# Altium PCB PCB1.PcbDoc (part 1 of 2)
Units mm, origin at the board's own origin, x right, y up, seen from the top; angles counter-clockwise.
Board outline 65.4 x 65.4 mm, 4 copper layers (Top Layer, Internal Plane 1, Signal Layer 1, Bottom Layer), stack 0.778 mm thick; 93 components, 59 nets, 348 pads, 1252 vias.
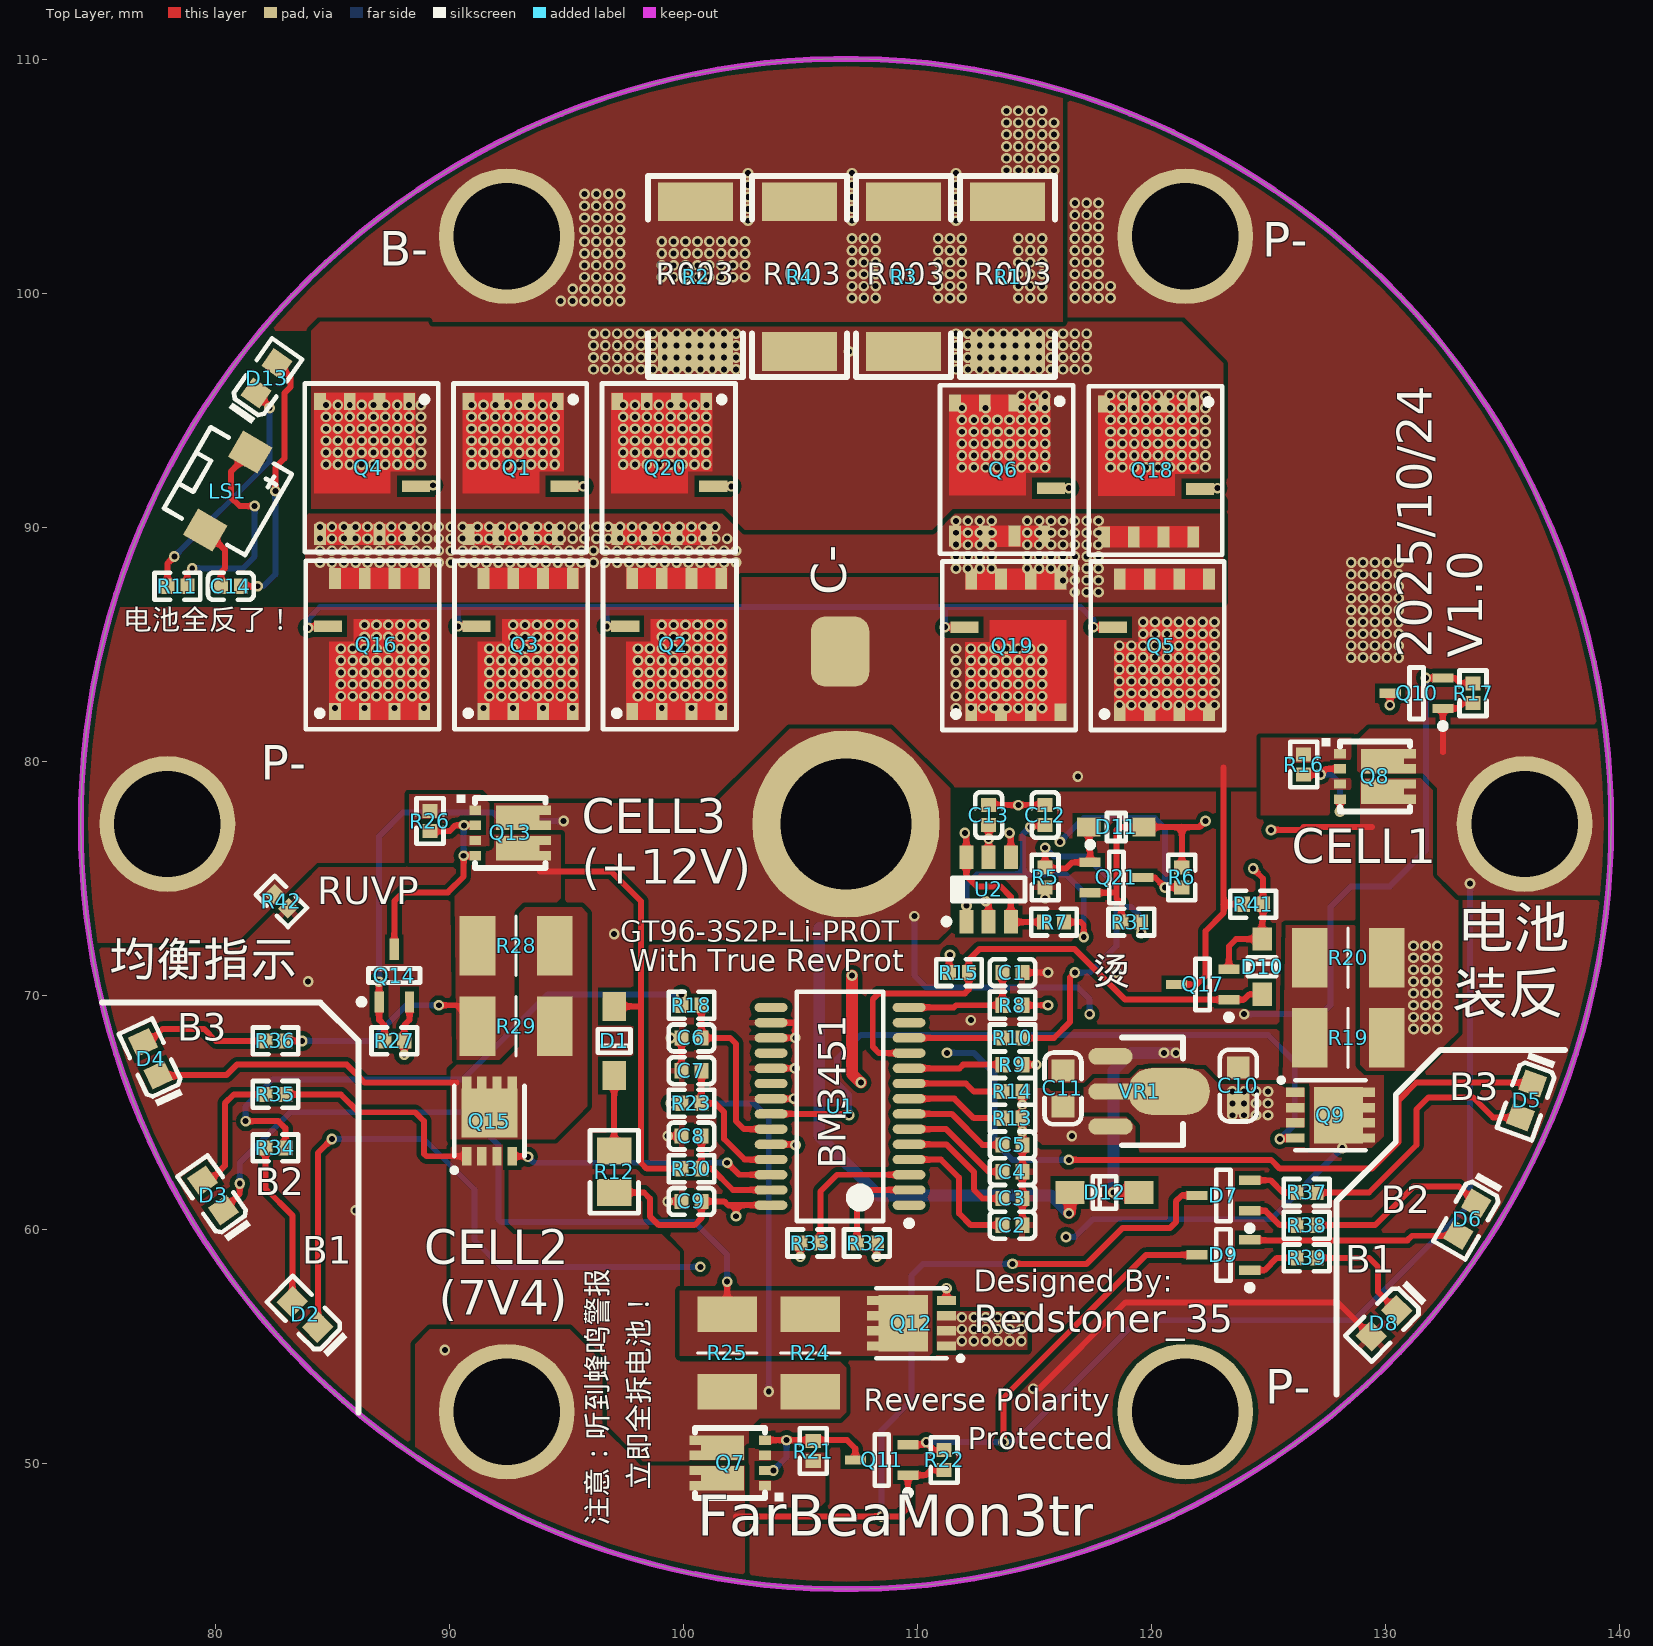
[diagram p0: Top Layer view]
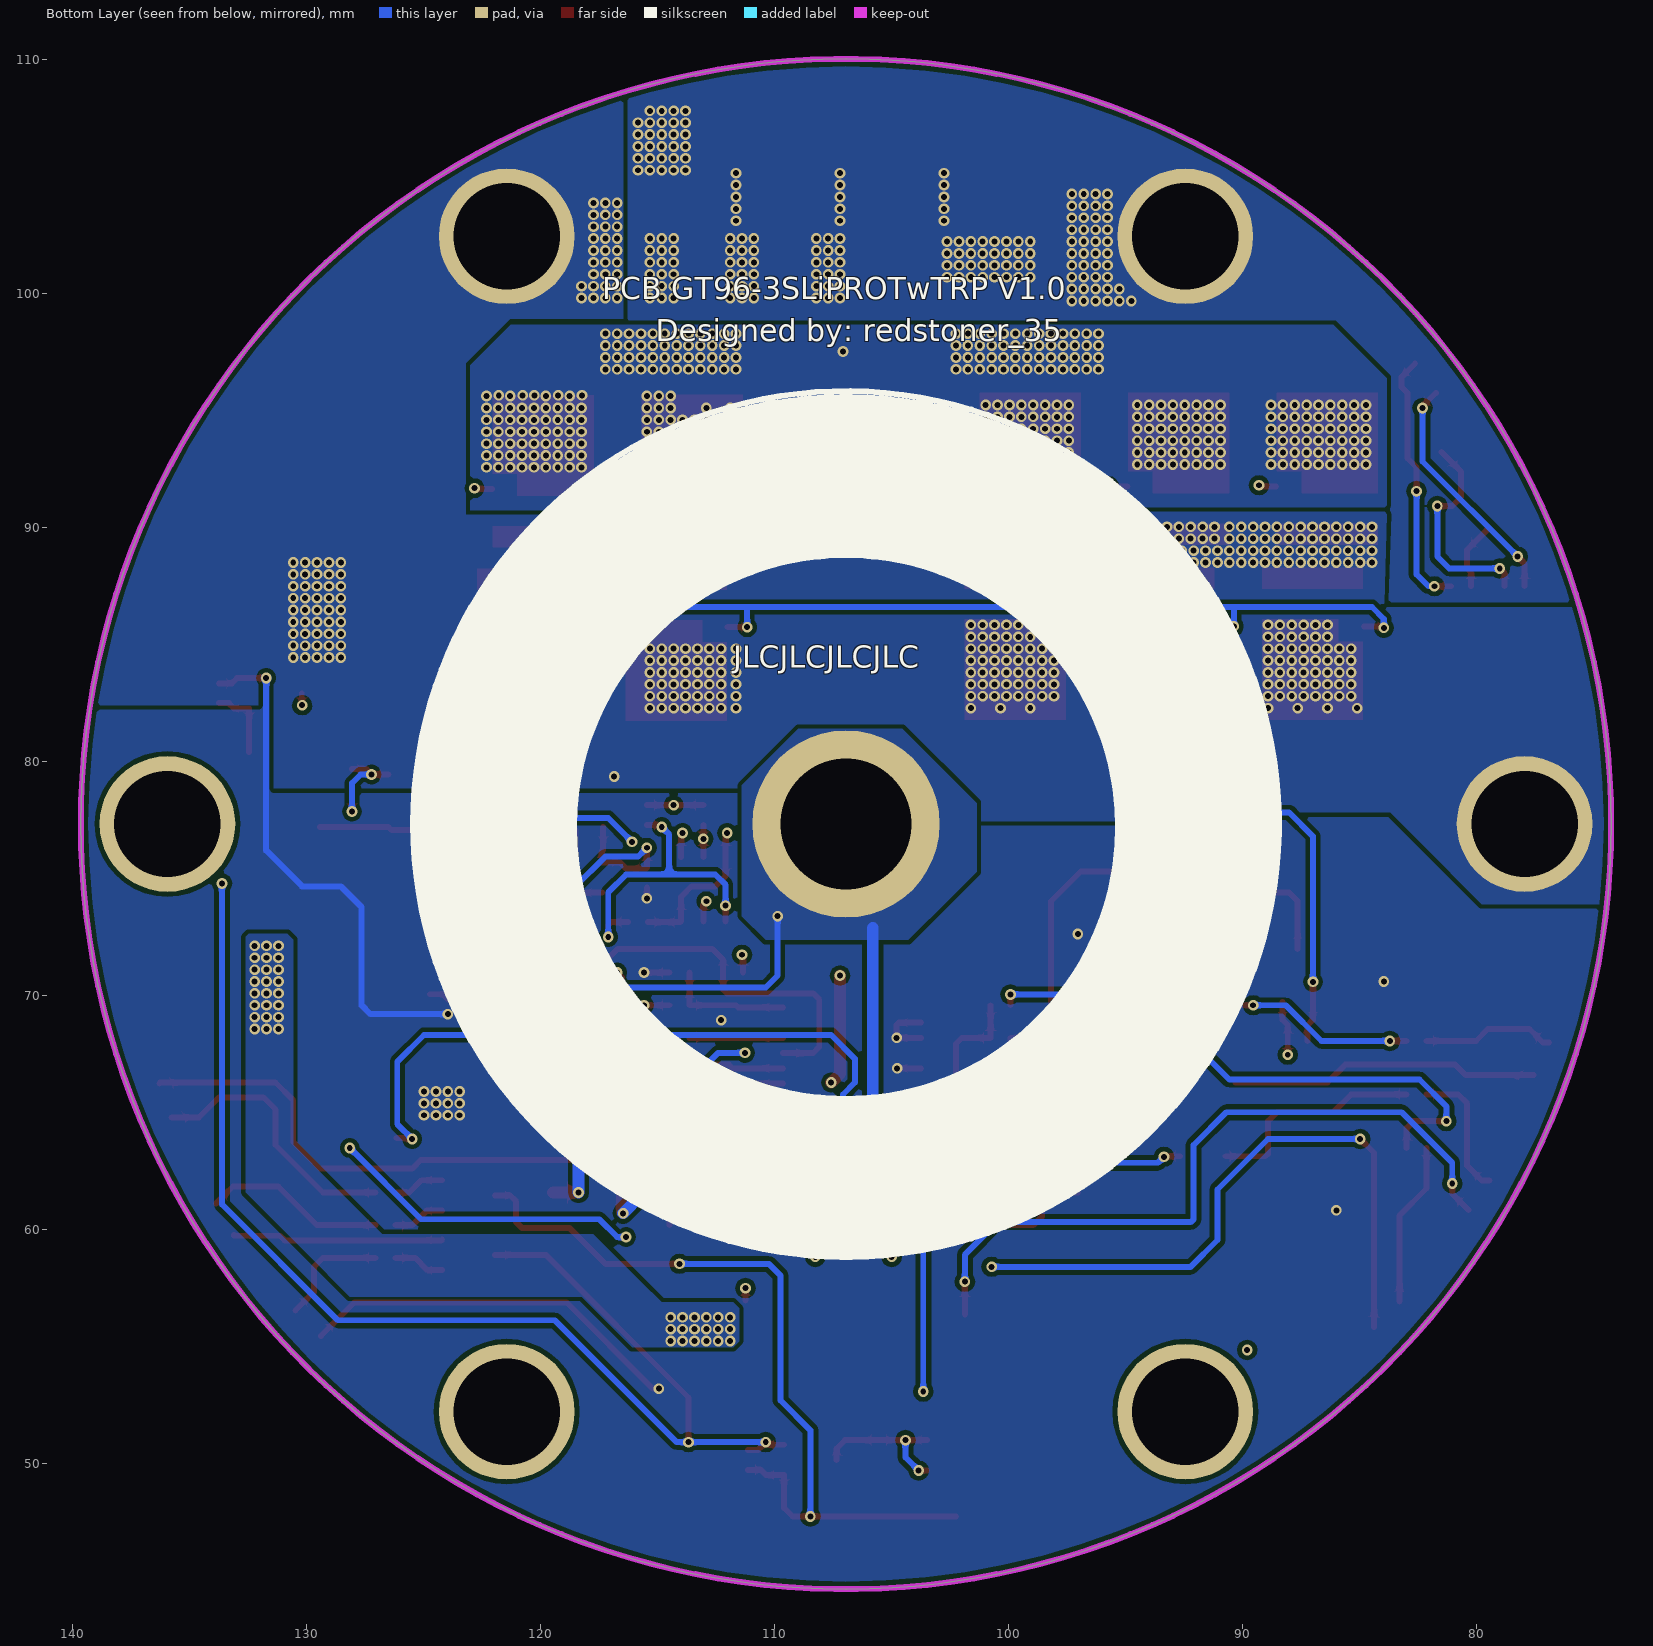
[diagram p1: Bottom Layer view, seen from below]
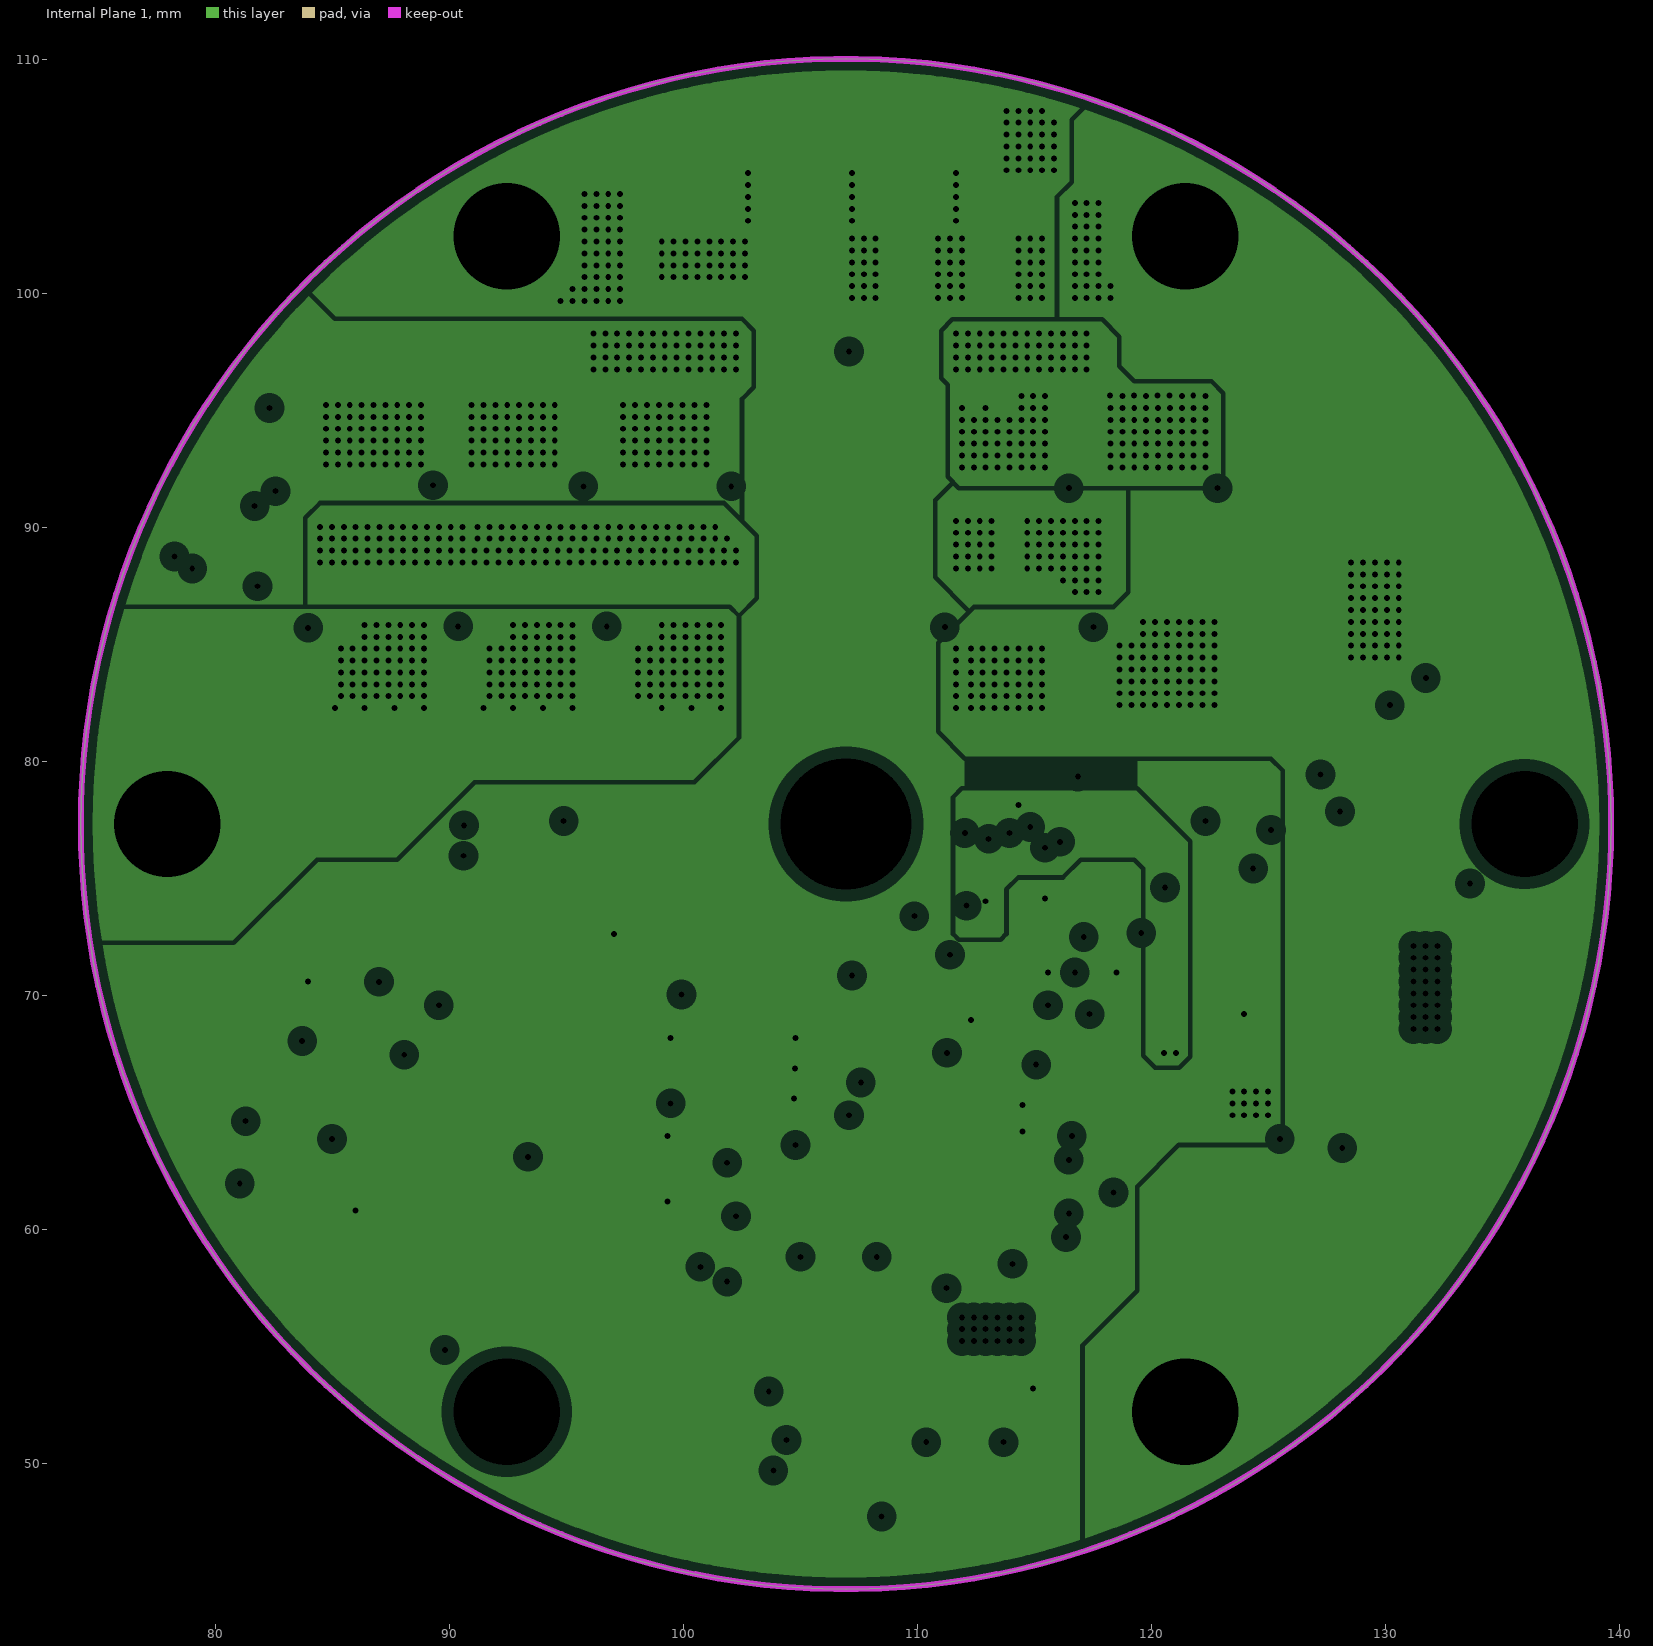
[diagram p2: Internal Plane 1, clearances drawn from the general rule]
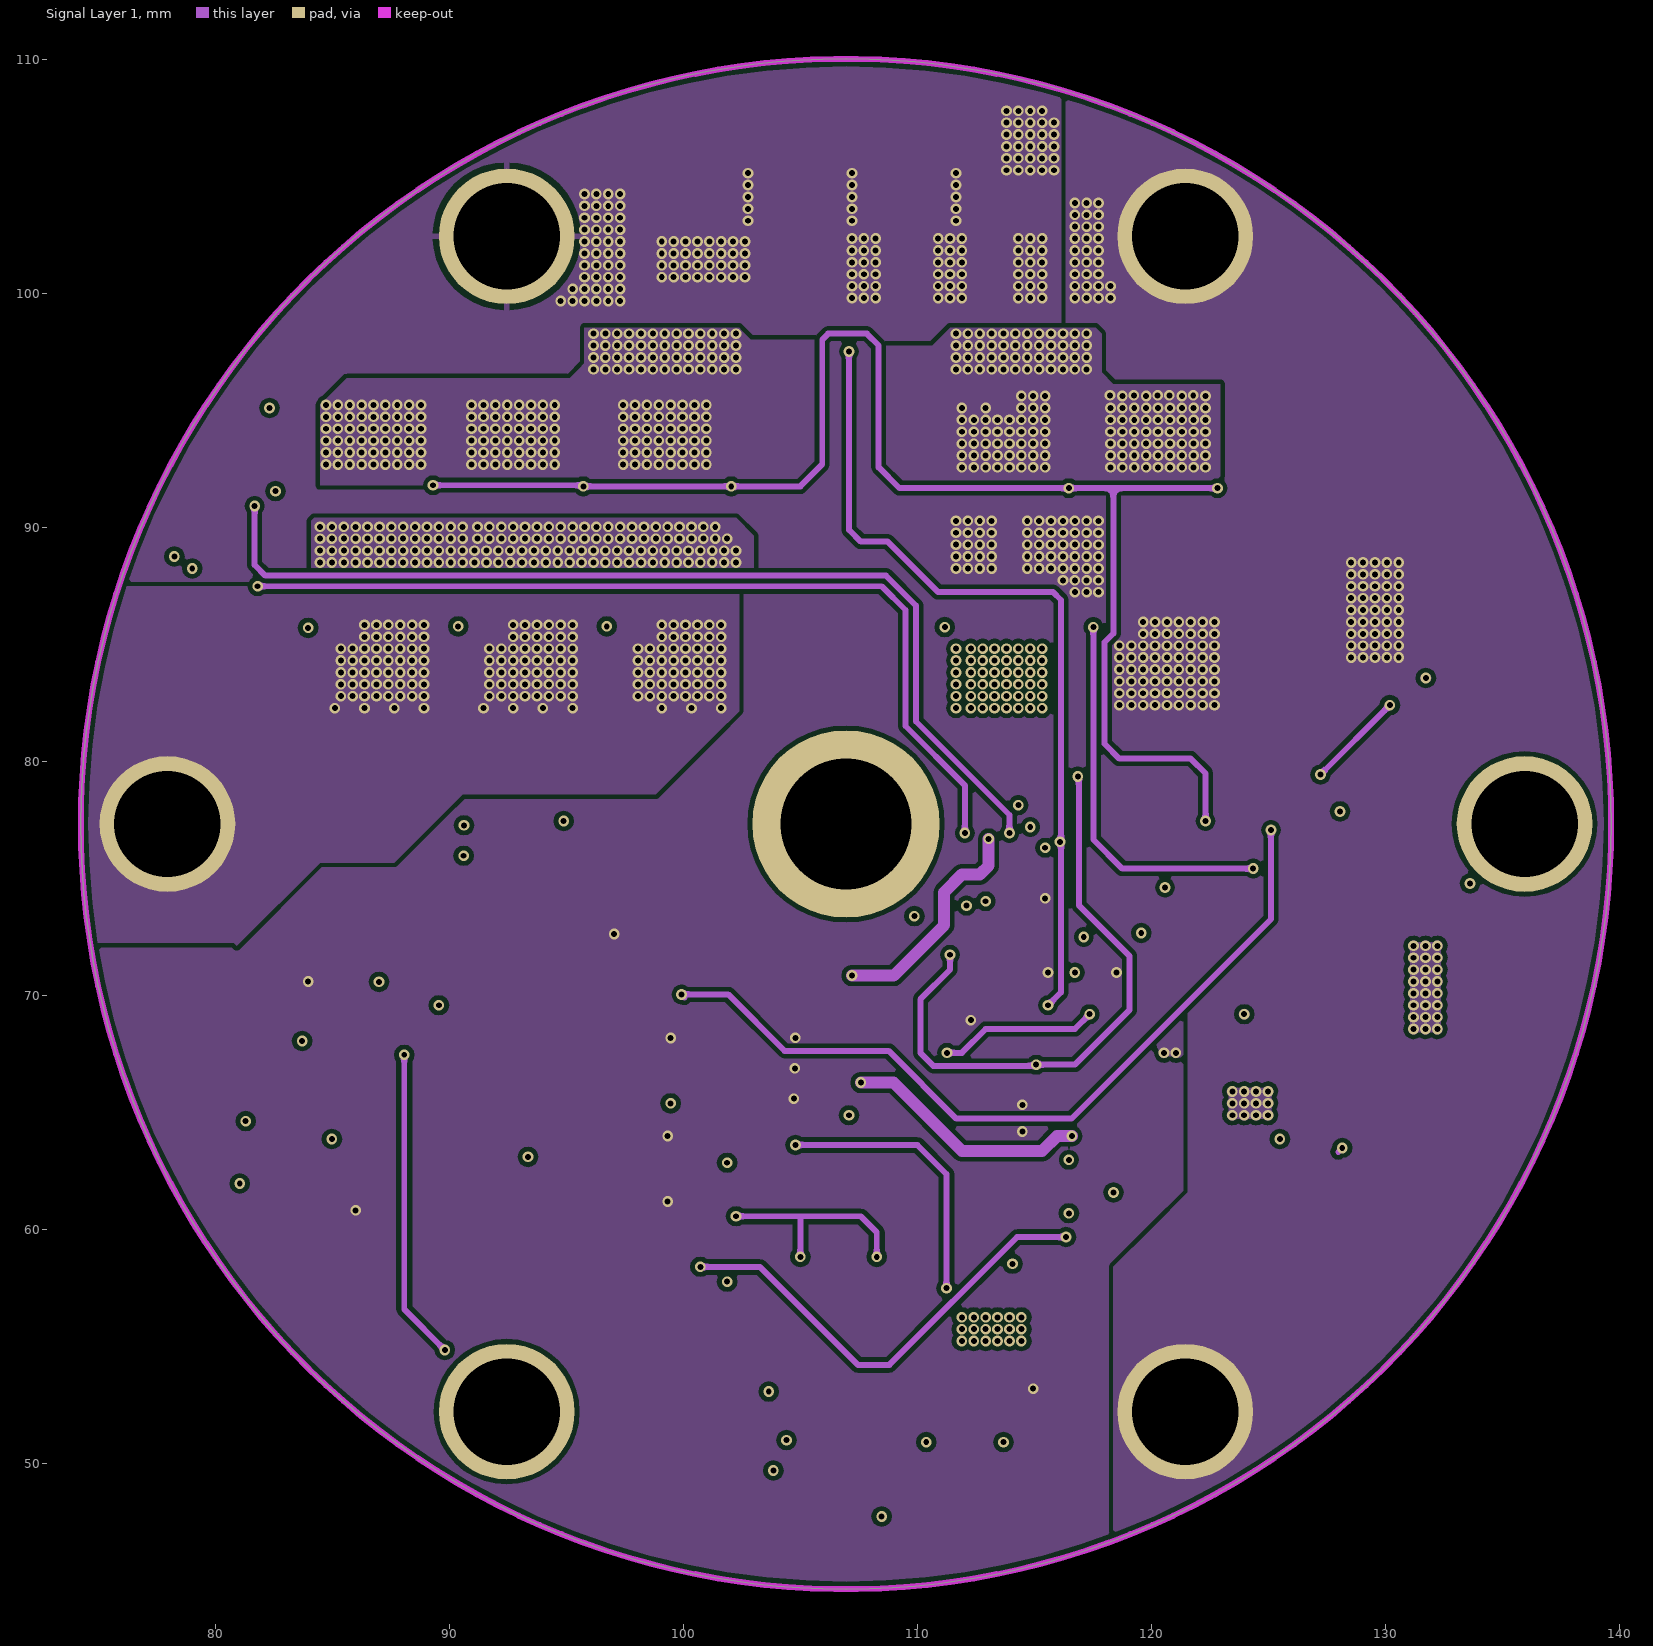
[diagram p3: Signal Layer 1]
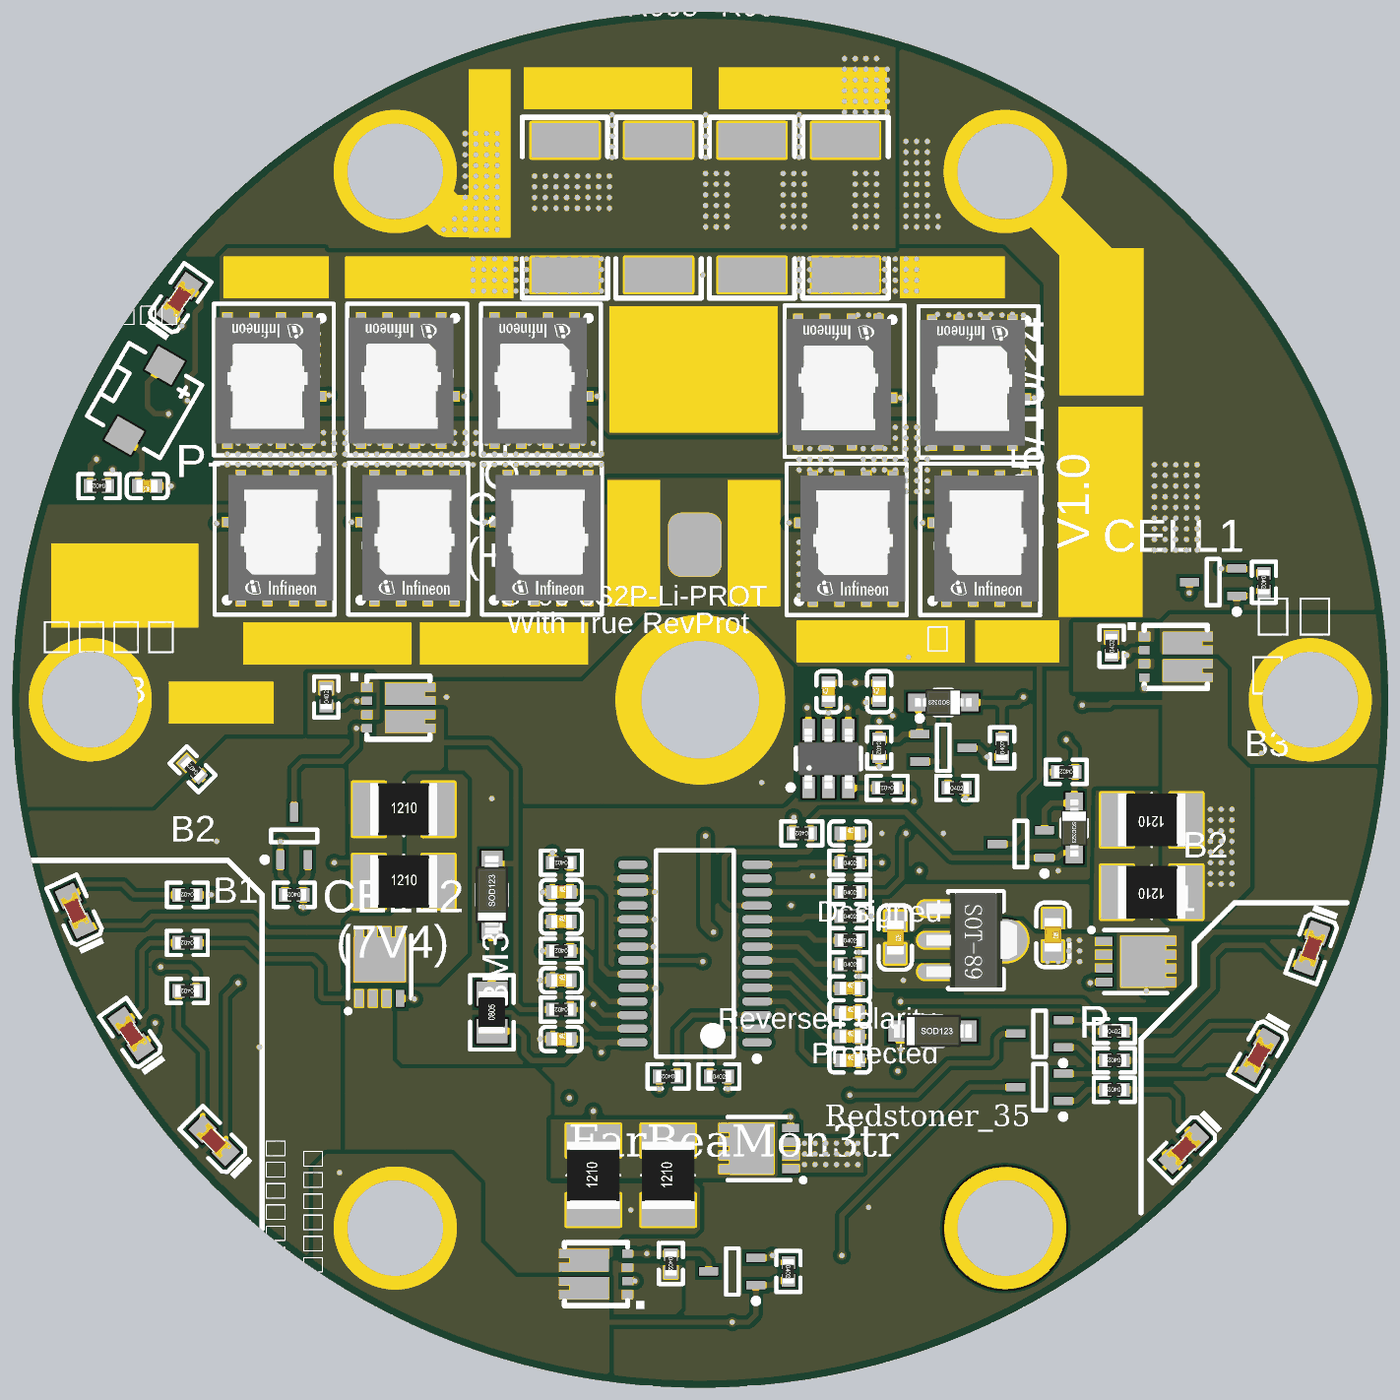
[diagram p5: 3D render of the assembled board from above, using the file's embedded part models]

## Layer stack, top to bottom
Top Solder: solder mask 0.0102, Solder Resist, Dk 3.5
Top Layer: signal copper 0.0356
Dielectric 1: core 0.254, FR-4, Dk 4.2
Internal Plane 1: plane copper 0.036
Dielectric 3: prepreg 0.127, Dk 4.2
Signal Layer 1: signal copper 0.036
Dielectric 2: core 0.254, Dk 4.2
Bottom Layer: signal copper 0.0356
Bottom Solder: solder mask 0.0102, Solder Resist, Dk 3.5

## Board outline
74.234,77.343 ccw(c106.934,77.343) 106.934,44.643 ccw(c106.934,77.343) 139.634,77.343 ccw(c106.934,77.343) 106.934,110.043 ccw(c106.934,77.343)

## Design rules (kind name [scope] priority, off if disabled: settings)
Clearance [All] p1: gap=0.198
PlaneClearance [All] p1: clearance=0.508
PlaneConnect [All] p1: planeconnectstyle=Direct reliefexpansion=0.508 reliefentries=4 reliefconductorwidth=0.254 reliefairgap=0.254
PolygonConnect PolygonConnect_1 [IsVia] p1: connectstyle=Direct reliefconductorwidth=0.254 reliefentries=4 polygonreliefangle="90 Angle" airgapwidth=0.254
PolygonConnect [All] p2: connectstyle=Relief reliefconductorwidth=0.254 reliefentries=4 polygonreliefangle="90 Angle" airgapwidth=0.254
RoomDefinition main [InComponentClass('main')] p1: confinementstyle=ConfineIn formatcopy=TRUE lockcomponents=FALSE outline 178.943,26.924 277.241,26.924 277.241,40.259 178.943,40.259
RoutingVias [All] p1: holewidth=0.711 width=1.27 viastyle="Through Hole" minholewidth=0.711 minwidth=1.27 maxholewidth=0.711 maxwidth=1.27
SolderMaskExpansion [All] p1: expansion=0.102
Width [All] p1: maxlimit=50.8 minlimit=0.178 preferedwidth=0.254
28 further rules are at their usual default settings.

## Components (designator, comment, footprint, x,y, rotation, side; value= is the part's Value field where it differs from the comment)
C1 "10nF (103) 10% 50V" 0402_C 114.046,70.993 r0 top
C2 "100nF (104) 10% 16V" 0402_C 114.046,60.198 r0 top
C3 "100nF (104) 10% 16V" 0402_C 114.046,61.341 r0 top
C4 "100nF (104) 10% 16V" 0402_C 114.046,62.484 r0 top
C5 "100nF (104) 10% 16V" 0402_C 114.046,63.627 r0 top
C6 "1.0uF (105) 10% 25V" 0402_C 100.33,68.199 r0 top
C7 "1.0uF (105) 10% 25V" 0402_C 100.33,66.802 r0 top
C8 "1.0uF (105) 10% 25V" 0402_C 100.33,64.008 r0 top
C9 "2.2uF (225) 10% 25V" 0402_C 100.33,61.214 r0 top
C10 "1uF (105) 10% 50V" 0603_C 123.698,66.167 r270 top
C11 "10uF (106) 10% 10V" 0603_C 116.205,66.04 r270 top
C12 "150nF (154) 10% 16V" 0402_C 115.443,77.724 r90 top
C13 "100nF (104) 10% 16V" 0402_C 113.03,77.724 r90 top
C14 "10uF (106) 20% 10V" 0402_C 80.645,87.503 r180 top
D1 "B5819W  SL" SOD-123 97.028,68.072 r90 top
D2 "绿灯 0603" 0603_LED_S1 83.82,56.388 r135 top
D3 "绿灯 0603" 0603_LED_S1 79.883,61.468 r125 top
D4 "绿灯 0603" 0603_LED_S1 77.216,67.31 r115 top
D5 "红灯 0603" 0603_LED_S1 136.017,65.532 r250 top
D6 "红灯 0603" 0603_LED_S1 133.477,60.452 r240 top
D7 "BAV99W" SC70-3 123.063,61.468 r180 top
D8 "红灯 0603" 0603_LED_S1 129.921,56.007 r225 top
D9 "BAV99W" SC70-3 123.063,58.928 r180 top
D10 "1N5819WS S4" SOD-323 124.714,71.247 r270 top
D11 "1N5819WS S4" SOD-323 118.491,77.216 r180 top
D12 "B5819W  SL" SOD-123 117.983,61.595 r0 top
D13 "无级红灯 0603" 0603_LED_S1 82.169,96.393 r55 top
LS1 "FUET-4020C" FUET-4020C 80.518,91.567 r240 top
Q1 "IQDH29NE2LM5CGSC" IFX-PG-WHTFN-9-2-V 92.858,92.565 r270 top
Q2 "IQDH29NE2LM5CGSC" IFX-PG-WHTFN-9-2-V 99.552,84.996 r90 top
Q3 "IQDH29NE2LM5CGSC" IFX-PG-WHTFN-9-2-V 93.202,84.996 r90 top
Q4 "IQDH29NE2LM5CGSC" IFX-PG-WHTFN-9-2-V 86.508,92.565 r270 top
Q5 "IQDH29NE2LM5CGSC" IFX-PG-WHTFN-9-2-V 120.396,84.963 r90 top
Q6 "IQDH29NE2LM5CGSC" IFX-PG-WHTFN-9-2-V 113.649,92.489 r270 top
Q7 "XPX30V02" EDFN3x3 101.981,50.038 r90 top
Q8 "XPX30V02" EDFN3x3 129.54,79.375 r270 top
Q9 "WSD3050DN" DFN-8_L3.0-W3.0-P0.65-BL 127.635,64.897 r270 top
Q10 "2N7002KW" SC70-3 131.318,82.931 r180 top
Q11 "2N7002KW" SC70-3 108.458,50.165 r180 top
Q12 "WSD3050DN" DFN-8_L3.0-W3.0-P0.65-BL 109.728,56.007 r90 top
Q13 "XPX30V02" EDFN3x3 92.583,76.962 r270 top
Q14 "2N7002KW" SC70-3 87.63,70.866 r90 top
Q15 "WSD3050DN" DFN-8_L3.0-W3.0-P0.65-BL 91.694,64.643 r0 top
Q16 "IQDH29NE2LM5CGSC" IFX-PG-WHTFN-9-2-V 86.852,84.996 r90 top
Q17 "BSS84PW" SC70-3 122.174,70.485 r180 top
Q18 "IQDH29NE2LM5CGSC" IFX-PG-WHTFN-9-2-V 120.015,92.456 r270 top
Q19 "IQDH29NE2LM5CGSC" IFX-PG-WHTFN-9-2-V 114.046,84.963 r90 top
Q20 "IQDH29NE2LM5CGSC" IFX-PG-WHTFN-9-2-V 99.208,92.565 r270 top
Q21 "BSS84PW" SC70-3 118.491,75.057 r0 top
R1 "R003" 2512 112.268,97.536 r90 top
R2 "R003" 2512 98.933,97.536 r90 top
R3 "R003" 2512 107.823,97.536 r90 top
R4 "R003" 2512 103.378,97.536 r90 top locked
R5 "5.6MΩ (5604) ±1%" 0402_R 115.443,75.057 r270 top
R6 "5.6MΩ (5604) ±1%" 0402_R 121.285,75.057 r90 top
R7 "2KΩ (2001) ±1%" 0402_R 115.824,73.152 r180 top
R8 "2KΩ (2001) ±1%" 0402_R 114.046,69.596 r0 top
R9 "220KΩ (2203) ±1%" 0402_R 114.046,67.056 r0 top
R10 "1Ω (1R00) ±1%" 0402_R 114.046,68.199 r0 top
R11 "1KΩ (1001) ±1%" 0402_R 78.359,87.503 r180 top
R12 "1KΩ (1001) ±1%" 0805_R 97.028,62.484 r90 top
R13 "SDNT1005X104F4250FTF" 0402_R 114.046,64.77 r0 top
R14 "40.2KΩ (4022) ±1%" 0402_R 114.046,65.913 r0 top
R15 "5.6MΩ (5604) ±1%" 0402_R 111.76,70.993 r180 top
R16 "470KΩ (4702) ±1%" 0402_R 126.492,79.883 r90 top
R17 "470KΩ (4703) ±1%" 0402_R 133.731,82.931 r270 top
R18 "1KΩ (1001) ±1%" 0402_R 100.33,69.596 r180 top
R19 "22R" 1210R 128.397,68.199 r180 top
R20 "22R" 1210R 128.397,71.628 r180 top
R21 "470KΩ (4703) ±1%" 0402_R 105.537,50.546 r270 top
R22 "470KΩ (4703) ±1%" 0402_R 111.125,50.165 r270 top
R23 "1KΩ (1001) ±1%" 0402_R 100.33,65.405 r180 top
R24 "22R" 1210R 105.41,54.737 r90 top
R25 "22R" 1210R 101.854,54.737 r90 top
R26 "470KΩ (4703) ±1%" 0402_R 89.154,77.47 r90 top
R27 "470KΩ (4703) ±1%" 0402_R 87.63,68.072 r180 top
R28 "22R" 1210R 92.837,72.136 r0 top
R29 "22R" 1210R 92.837,68.707 r0 top
R30 "1KΩ (1001) ±1%" 0402_R 100.33,62.611 r180 top
R31 "200Ω (2000) ±1%" 0402_R 119.126,73.152 r0 top
R32 "1KΩ (1001) ±1%" 0402_R 107.823,59.436 r0 top
R33 "1KΩ (1001) ±1%" 0402_R 105.41,59.436 r180 top
R34 "1KΩ (1001) ±1%" 0402_R 82.55,63.5 r180 top
R35 "1KΩ (1001) ±1%" 0402_R 82.55,65.786 r180 top
R36 "1KΩ (1001) ±1%" 0402_R 82.55,68.072 r180 top
R37 "1KΩ (1001) ±1%" 0402_R 126.619,61.595 r0 top
R38 "1KΩ (1001) ±1%" 0402_R 126.619,60.198 r180 top
R39 "1KΩ (1001) ±1%" 0402_R 126.619,58.801 r180 top
R41 "5.6MΩ (5604) ±1%" 0402_R 124.333,73.914 r180 top
R42 "10MΩ (1005) ±1%" 0402_R 82.804,74.041 r135 top
U1 "BM3451VJDC-T28A" TSSOP28-BM3451 106.68,65.278 r180 top
U2 "SN74LVC2G14DBVR" DBV0006A_N 113.03,74.549 r90 top
VR1 "HT7533-1" SOT-89(SOT-89-3) 118.237,65.913 r180 top

## Footprints (in the part's own frame and the unit in brackets; to place one, negate y for a bottom-side part, rotate by r counter-clockwise, add the part's x,y. Pads: shape width x height; smd on the part's side, far side on the other; paste and mask are expansions set on the pad)
0402_C [mm]
  rect 0.6x0.65 smd mask+0.051: 1(-0.425,0) 2(0.425,0)
  silkscreen extent -0.97,-0.58 0.97,0.58, body extent -0.48,-0.3 0.52,0.3, height 0.2
0402_R [mm]
  rect 0.6x0.65 smd mask+0.051: 1(-0.425,0) 2(0.425,0)
  silkscreen extent -0.97,-0.58 0.97,0.58, body extent -0.57,-0.27 0.58,0.28, height 0.41
0603_C [mm]
  rect 0.93x0.98 smd: 1(-0.77,0) 2(0.77,0)
  silkscreen extent -1.53,-0.79 1.54,0.79, body extent -0.8,-0.4 0.8,0.4, height 0.3
0603_LED_S1 [mm]
  rect 0.93x0.98 smd: A(0.77,0) K(-0.77,0)
  silkscreen extent -1.98,-0.79 1.54,0.79, body extent -0.8,-0.4 0.8,0.4, height 0.6
0805_R [mm]
  rect 1.16x1.47 smd: 1(-0.89,0) 2(0.89,0)
  silkscreen extent -1.77,-1.04 1.77,1.03, body extent -1,-0.62 1,0.63, height 0.49
1210R [mil]
  rect 60x100 smd: 1(-65,0) 2(65,0)
  silkscreen extent 0,-50 0,50, body extent -63,-49 63,49, height 24
2512 [mm]
  rect 1.65x3.2 smd: 1(0,-1.575) 2(6.401,-1.575)
  silkscreen extent -1.09,-3.61 7.49,0.46
DBV0006A_N [mm] "SOT23, 6-Leads, Body 3.05x1.75mm, Pitch 0.95mm, IPC Medium Density"
  rect 1x0.6 smd: 1(-1.375,0.95) 2(-1.375,0) 3(-1.375,-0.95) 4(1.375,-0.95) 5(1.375,0) 6(1.375,0.95)
  silkscreen extent -1.5,-1.55 0.5,1.92, body extent -1.42,-1.46 1.42,1.46, height 1.45
DFN-8_L3.0-W3.0-P0.65-BL [mm]
  rect 0.4x0.8 smd paste-100 mask+0.051: 1(-0.975,-1.5) 2(-0.325,-1.5) 3(0.325,-1.5) 4(0.975,-1.5) 5(0.975,1.5) 6(0.325,1.5) 7(-0.325,1.5) 8(-0.975,1.5)
  rect 2.4x2.1 smd paste-100 mask+0.051: 8(0,0.35)
  silkscreen extent -1.6,-2.2 1.5,1.5, body extent -1.52,-1.52 1.52,1.52, height 1.2
EDFN3x3 [mm] "Package for EMF20B02V, Dual Drain DFN3x3"
  rect 0.4x0.5 smd mask+0.03: 1(-0.975,-1.494) 2(-0.325,-1.494) 3(0.325,-1.494) 4(0.975,-1.494) 5(0.325,1.494) 5(0.975,1.494) 6(-0.975,1.494) 6(-0.325,1.494)
  rect 1.05x1.85 smd mask+0.03: 5(0.65,0.321) 6(-0.65,0.321)
  silkscreen extent -1.65,-2.29 1.5,1.5, body extent -1.52,-1.52 1.52,1.52, height 0.9
FUET-4020C [mm] "福声科技电磁式侧发声蜂鸣器"
  rect 1.3x1.45 smd: 1(-1.925,0) 2(1.925,0)
  silkscreen extent -2,-2 2,2, body extent -2,-2 2,2, height 2
IFX-PG-WHTFN-9-2-V [mm] "PG-WHTFN-9-2, SMD, 1.27 mm pitch, 9 pin, 6.00 mm L X 5.00 W mm X 0.75 mm H body"
  rect 0.732x0.5 smd paste-0.25 mask-0.25: 1(-2.842,1.757) 2(-2.842,0.487) 3(-2.842,-0.783) 4(-2.842,-2.053)
  rect 0.9x0.5 smd paste-0.25 mask-0.25: 5(2.842,-2.053) 6(2.842,-0.783) 7(2.842,0.487) 8(2.842,1.757)
  rect 0.5x1.2 smd paste-0.05 mask+0: 9(0.792,2.053)
  Top Layer region: 1.092,-2.302 -3.208,-2.302 -3.208,-1.802 -3.208,-1.032 -3.208,-0.532 -3.208,0.238 -3.208,0.738 -3.208,1.508 -3.208,2.008 0.142,2.008 0.142,0.958 1.092,0.958
  Top Layer region: 3.292,2.008 3.292,-2.302 2.392,-2.302 2.392,2.008 3.292,2.008
  silkscreen extent -3.6,-2.7 3.6,3, body extent -2.96,-2.65 3.04,2.35, height 0.75
SC70-3 [mm] "3 Lead SC70(SOT-323) package for small Transistor"
  rect 0.9x0.4 smd mask+0.05: 1(-1.125,0.65) 2(-1.125,-0.65) 3(1.125,0)
  silkscreen extent -1.25,-1.1 0.3,1.52, body extent -0.67,-1.1 0.67,1.1, height 1.1
SOD-123 [mm]
  rect 1.25x1 smd: 1(1.475,0) 2(-1.475,0)
  silkscreen extent -0.5,-0.7 0.5,0.7, body extent -1.85,-0.77 1.85,0.78, height 1.35
SOD-323 [mm]
  rect 1x0.83 smd: 1(1.18,0) 2(-1.18,0)
  silkscreen extent -0.4,-0.6 0.4,0.6, body extent -1.35,-0.62 1.35,0.63, height 1.1
SOT-89(SOT-89-3) [mm]
  oval 1.9x0.7 smd: 1(0,-1.5) 3(0,1.5)
  oval 3.5x2 smd: 2(-2.5,0)
  oval 2.1x0.7 smd: 2(-0.1,0)
  silkscreen extent -3.1,-2.3 -0.5,2.3, body extent -3.75,-2.25 0.55,2.25, height 1.51
TSSOP28-BM3451 [mm] "TSOP, 28-Leads, Body 9.70x4.40mm, Pitch 0.65mm, IPC Medium Density"
  oval 1.4x0.4 smd mask+0.03: 1(-2.95,4.225) 2(-2.95,3.575) 3(-2.95,2.925) 4(-2.95,2.275) 5(-2.95,1.625) 6(-2.95,0.975) 7(-2.95,0.325) 8(-2.95,-0.325) 9(-2.95,-0.975) 10(-2.95,-1.625) 11(-2.95,-2.275) 12(-2.95,-2.925) 13(-2.95,-3.575) 14(-2.95,-4.225) 15(2.95,-4.225) 16(2.95,-3.575) 17(2.95,-2.925) 18(2.95,-2.275) 19(2.95,-1.625) 20(2.95,-0.975) 21(2.95,-0.325) 22(2.95,0.325) 23(2.95,0.975) 24(2.95,1.625) 25(2.95,2.275) 26(2.95,2.925) 27(2.95,3.575) 28(2.95,4.225)
  silkscreen extent -3.08,-4.9 1.85,5.12, body extent -2.25,-4.9 2.25,4.9, height 1.2

## Part data
C1: library part "0402 10nF (103) 10% 50V", "贴片电容"
C2 C3 C4 C5 C12 C13: library part "0402 100nF (104) 10% 16V", "贴片电容"
C6 C7 C8: library part "0402 1.0uF (105) 10% 25V", "贴片电容"
C9: library part "0402 2.2nF (222) 10% 50V", "贴片电容"
C10: library part "0603 1uF (105) 10% 50V", "贴片电容"
C11: library part "0603 10uF (106) 10% 10V", "贴片电容"
C14: library part "0402 10uF (106) 20% 6.3V", "贴片电容"
D1 D12: library part "SOD-123 B5819W  SL", "肖特基二极管"
D2 D3 D4: library part "0603 绿灯", "发光二极管"
D5 D6 D8 D13: library part "0603 红灯", "发光二极管"
D7 D9: library part "SOT-23 BAV99 A7W", "开关二极管"
D10 D11: library part "SOD-323 1N4148WS T4", "二极管"
LS1: library part Buzzer, "福声科技有限公司侧发声电磁式蜂鸣器，4*4*2mm尺寸"
Q1 Q2 Q3 Q4 Q5 Q6 Q16 Q18 Q19 Q20: "Insulated-Gate Field-Effect Transistor (IGFET), N-Channel, Enhancement, Body Diode, Pin 1 Source, 2 Source, 3 Source, 4 Sourse, 5 Drain, 6 Drain, 7 Drain, 8 Drain, 9 Gate, 9 Pins"
Q7 Q8 Q13: library part XPX10H03RX, "双N沟道MOSFET, DFN3x3 30V 40A 10mΩ"
Q9 Q12 Q15: library part "SON/DFN5x6 MOS", "PDFN3x3 20V 50A 5.8mΩ N-Ch MOSFET"
Q10 Q11 Q14: library part "2N7002 7002", "单N沟道MOSFET(场效应管)"
Q17 Q21: library part SI2301CDS-T1-GE3, "MOS(场效应管)"
R1 R2 R3 R4: library part Res, "2512尺寸 3W 3mΩ ±1% 合金检流电阻"
R5 R6 R15 R41: library part "0402 1MΩ (1004) 1%", "贴片电阻"
R7 R11 R18 R23 R30 R32 R33 R34 R35 R36 R37 R38 R39: library part "0402 1KΩ (1001) 1%", "贴片电阻"
R8: library part "0402 2KΩ (2001) 1%", "贴片电阻"
R9: library part "0402 220KΩ (2203) 1%", "贴片电阻"
R10: library part "0402 1Ω (1R00) 1%", "贴片电阻"
R12: library part "0805 1KΩ (1001) 1%", "贴片电阻"
R13: library part "0402 100KΩ (1003) 1%", "贴片NTC热敏电阻 100KΩ (1003) ±1% B4250"
R14: library part "0402 56KΩ (5602) 1%", "贴片电阻"
R16: library part "0402 20KΩ (2002) 1%", "贴片电阻"
R17 R21 R22 R26 R27: library part "0402 470KΩ (4703) 1%", "贴片电阻"
R19 R20 R24 R25 R28 R29: library part Res, "Resistor"
R31: library part "0402 200Ω (2000) 1%", "贴片电阻"
R42: library part "0402 10MΩ (1005) 1%", "贴片电阻"
U1: library part BM3451-T28A, "2-5串全功能锂电池保护IC，支持级联功能"
U2: "Dual Schmitt-Trigger Inverter, DBV0006A, LARGE T&R"
VR1: library part "SOT-89 HT7533-1", "低压差线性稳压(LDO)"

## Free pads (board coordinates)
  round 5.8 hole 4.55 mask+0.03: 0(77.934,77.343) 0(92.434,52.228) 0(92.434,102.458) 0(121.434,102.458) 0(135.934,77.343)
  rrect50% 2.5x3 smd mask+0.03: 0(106.68,84.709)
  round 5.8 hole 4.55: 0(121.434,52.228)
  round 8 hole 5.6 mask+0.03: 2(106.934,77.343)

## Via types
v1: diameter 0.457, hole 0.254, Top Layer to Bottom Layer, tented both sides, 1252 vias

## Nets (pads, with @x,y where several pads share a name; then routed paths per layer and width w, separated by ;. In a path a pad name is that pad's centre, name@x,y a point inside that pad or via, vN(x,y) a via of type N, cw(c..) or ccw(c..) an arc to the next point about the centre after c; other vN are vias at no path point)
3V7: Q8.5 Q12.1 Q12.2 Q12.3 R18.2 R19.1 R20.1 R34.1 | length 63.6
  Top Layer w0.254: v1(81.28,64.643) 82.677,64.643 82.975,64.345 R34.1@82.975,63.5 ; R18.2@99.905,69.596 v1(99.905,70.06) ; v1(125.095,77.089) 126.365,77.089 126.492,77.216 129.413,77.216
  Signal Layer 1 w0.254: v1@100.03,69.935 v1(99.905,70.06) 101.898,70.06 104.309,67.649 108.754,67.649 111.651,64.752 116.568,64.752 125.095,73.279 v1(125.095,77.089)
  Bottom Layer w0.254: v1(81.28,64.643) 81.28,65.278 82.423,66.421 90.551,66.421 94.19,70.06 v1(99.905,70.06)
  other v1: 111.887,55.245 112.395,55.245 112.903,55.245 113.411,55.245 113.919,55.245 114.427,55.245 111.887,55.753 112.395,55.753 112.903,55.753 113.411,55.753 113.919,55.753 114.427,55.753 111.887,56.261 112.395,56.261 112.903,56.261 113.411,56.261 113.919,56.261 114.427,56.261 131.191,68.58 131.699,68.58 132.207,68.58 131.191,69.088 131.699,69.088 132.207,69.088 131.191,69.596 131.699,69.596 132.207,69.596 131.191,70.104 131.699,70.104 132.207,70.104 131.191,70.612 131.699,70.612 132.207,70.612 131.191,71.12 131.699,71.12 132.207,71.12 131.191,71.628 131.699,71.628 132.207,71.628 131.191,72.136 131.699,72.136 132.207,72.136
3V7BAL: D2.K Q9.5 Q9.6 Q9.7 Q9.8 R19.2 R20.2 | length 60.8
  Top Layer w0.254: D2.K@84.364,55.844 84.364,63.282 v1(84.963,63.881)
  Signal Layer 1 w0.254: v1(100.711,58.42) 103.251,58.42 107.442,54.229 108.787,54.229 114.248,59.69 v1(116.332,59.69) ; 127.97,63.327 v1(128.143,63.5)
  Bottom Layer w0.254: v1(84.963,63.881) 88.9,63.881 91.059,61.722 91.059,59.563 92.202,58.42 v1(100.711,58.42) ; v1(116.332,59.69) 116.713,59.69 117.475,60.452 125.095,60.452 v1(128.143,63.5)
7V4: Q7.5 Q15.1 Q15.2 Q15.3 R23.2 R24.1 R25.1 R35.1 | length 26.3
  Top Layer w0.254: R35.1@82.975,65.786 85.344,65.786 86.106,65.024 88.519,65.024 88.9,64.643 88.9,63.246 89.003,63.143 Q15.1@90.719,63.143 ; v1(99.441,65.405) R23.2@99.905,65.405
  Bottom Layer w0.254: v1(99.441,65.405) 102.997,65.405 103.632,64.77 v1(103.632,53.086)
7V4BAL: D3.K Q12.5 Q12.6 Q12.7 Q12.8 R24.2 R25.2 | length 31
  Top Layer w0.254: D3.K@80.325,60.837 81.026,61.539 v1(81.026,61.976) ; R25.2@101.854,56.388 v1(101.854,57.785)
  Bottom Layer w0.254: v1(81.026,61.976) 81.026,62.865 83.185,65.024 90.678,65.024 92.075,63.627 92.075,60.452 92.202,60.325 100.457,60.325 101.854,58.928 v1(101.854,57.785)
12V: D5.K D12.2 pad.2 Q13.6 Q14.1 R27.2 | length 88.4
  Top Layer w0.254: v1(86.98,70.597) Q14.1@86.98,69.741 86.98,68.976 87.205,68.751 R27.2@87.205,68.072 ; v1(116.459,62.992) 125.095,62.992 125.476,62.611 129.413,62.611 130.556,63.754 130.556,65.532 131.318,66.294 136.242,66.294 D5.K@136.28,66.256
  Top Layer w0.508: v1(116.459,60.706) 116.508,60.755 D12.2@116.508,61.595
  Signal Layer 1 w0.254: v1(111.252,67.564) 111.887,67.564 112.903,68.58 116.713,68.58 v1(117.348,69.215)
  Bottom Layer w0.254: v1(86.98,70.597) 86.98,76.82 88.001,77.841 91.831,77.841 92.202,77.47 v1(94.869,77.47) ; v1(109.855,73.406) 109.855,70.866 110.363,70.358 116.84,70.358 117.348,69.85 v1(117.348,69.215) ; v1(111.252,67.564) 112.395,67.564 113.284,66.675 113.284,63.754 114.046,62.992 v1(116.459,62.992)
  Bottom Layer w0.508: 105.791,72.898 105.791,64.008 108.331,61.468 115.697,61.468 v1(116.459,60.706)
12VBAL: D4.K Q15.5 Q15.6 Q15.7 Q15.8 R28.2 R29.2 | length 13.3
  Top Layer w0.254: D4.K@77.541,66.612 80.455,66.612 80.899,67.056 85.598,67.056 86.36,66.294 90.297,66.294
B3V: C11.2 C13.1 U2.5 VR1.3 | length 26.3
  Top Layer w0.254: U2.5@113.03,75.924 C13.1@113.03,77.299
  Top Layer w0.508: v1(107.188,70.866) 107.188,66.675 v1(107.569,66.294)
  Signal Layer 1 w0.508: v1(107.188,70.866) 108.966,70.866 111.125,73.025 111.125,74.422 111.887,75.184 112.649,75.184 113.03,75.565 v1(113.03,76.708) ; v1(107.569,66.294) 108.966,66.294 111.887,63.373 115.316,63.373 115.951,64.008 v1(116.586,64.008)
BAL1: Q9.4 U1.22 | length 30.7
  Top Layer w0.254: U1.22@103.73,64.953 107.005,64.953 v1(107.061,64.897) ; v1(125.476,63.881) 125.517,63.922 Q9.4@126.135,63.922
  Bottom Layer w0.254: v1(107.061,64.897) 107.061,65.786 106.553,66.294 106.553,67.31 107.569,68.326 124.968,68.326 126.111,67.183 126.111,64.516 v1(125.476,63.881)
BAL2: Q12.4 U1.24 | length 13.4
  Top Layer w0.254: U1.24@103.73,63.653 v1@104.749,63.653 ; Q12.4@111.228,56.982 v1(111.228,57.507)
  Signal Layer 1 w0.254: v1(104.775,63.627) 109.982,63.627 111.228,62.381 v1(111.228,57.507)
BAL3: Q15.4 U1.26 | length 11.4
  Top Layer w0.254: Q15.4@92.669,63.143 93.321,63.143 v1(93.345,63.119) ; v1(101.854,62.865) 102.366,62.353 U1.26@103.73,62.353
  Bottom Layer w0.254: v1(93.345,63.119) 93.599,62.865 v1(101.854,62.865)
BAT-: C1.2 C2.2 C3.2 C4.2 C5.2 C6.1 C7.1 C8.1 C9.1 C10.2 D8.A pad.0@92.434,102.458 Q9.1 Q9.2 Q9.3 Q10.2 R1.2 R2.2 R3.2 R4.2 R5.2 R13.2 R14.2 R17.1 R42.1 U1.16 U1.17 U1.19 U1.21 VR1.2 | length 54.1
  Top Layer w0.254: v1(99.314,61.214) C9.1@99.905,61.214 ; v1(99.314,64.008) C8.1@99.905,64.008 ; v1(99.441,68.199) C6.1@99.905,68.199 C7.1@99.905,66.802 ; U1.21@103.73,65.603 v1(104.704,65.603) ; U1.19@103.73,66.903 v1(104.749,66.903) ; U1.17@103.73,68.203 v1(104.771,68.203) 104.771,68.761 104.679,68.853 U1.16@103.73,68.853 ; C2.2@114.471,60.198 C3.2@114.471,61.341 C4.2@114.471,62.484 C5.2@114.471,63.627 R13.2@114.471,64.77 R14.2@114.471,65.913 ; C1.2@114.471,70.993 v1(115.57,70.993) ; v1(114.935,53.213) 115.189,53.213 118.872,56.896 127.943,56.896 D8.A@129.377,55.463 ; v1(115.443,74.168) R5.2@115.443,74.632 ; v1(131.714,83.581) Q10.2@132.443,83.581 132.954,83.581 133.179,83.356 R17.1@133.731,83.356
  Bottom Layer w0.254: v1(123.952,69.215) 127.254,69.215 127.635,69.596 127.635,73.787 128.524,74.676 130.175,74.676 131.714,76.215 v1(131.714,83.581)
  other v1: 85.979,60.833 114.471,64.199 123.444,64.897 123.952,64.897 124.46,64.897 124.968,64.897 114.471,65.342 123.444,65.405 123.952,65.405 124.46,65.405 124.968,65.405 123.444,65.913 123.952,65.913 124.46,65.913 124.968,65.913 112.268,68.961 83.947,70.612 118.491,70.993 97.028,72.644 94.742,99.695 95.25,99.695 95.758,99.695 96.266,99.695 96.774,99.695 97.282,99.695 107.188,99.822 107.696,99.822 108.204,99.822 110.871,99.822 111.379,99.822 111.887,99.822 114.3,99.822 114.808,99.822 115.316,99.822 95.25,100.203 95.758,100.203 96.266,100.203 96.774,100.203 97.282,100.203 107.188,100.33 107.696,100.33 108.204,100.33 110.871,100.33 111.379,100.33 111.887,100.33 114.3,100.33 114.808,100.33 115.316,100.33 95.758,100.711 96.266,100.711 96.774,100.711 97.282,100.711 99.06,100.711 99.568,100.711 100.076,100.711 100.584,100.711 101.092,100.711 101.6,100.711 102.108,100.711 102.616,100.711 107.188,100.838 107.696,100.838 108.204,100.838 110.871,100.838 111.379,100.838 111.887,100.838 114.3,100.838 114.808,100.838 115.316,100.838 95.758,101.219 96.266,101.219 96.774,101.219 97.282,101.219 99.06,101.219 99.568,101.219 100.076,101.219 100.584,101.219 101.092,101.219 101.6,101.219 102.108,101.219 102.616,101.219 107.188,101.346 107.696,101.346 108.204,101.346 110.871,101.346 111.379,101.346 111.887,101.346 114.3,101.346 114.808,101.346 115.316,101.346 95.758,101.727 96.266,101.727 96.774,101.727 97.282,101.727 99.06,101.727 99.568,101.727 100.076,101.727 100.584,101.727 101.092,101.727 101.6,101.727 102.108,101.727 102.616,101.727 107.188,101.854 107.696,101.854 108.204,101.854 110.871,101.854 111.379,101.854 111.887,101.854 114.3,101.854 114.808,101.854 115.316,101.854 95.758,102.235 96.266,102.235 96.774,102.235 97.282,102.235 99.06,102.235 99.568,102.235 100.076,102.235 100.584,102.235 101.092,102.235 101.6,102.235 102.108,102.235 102.616,102.235 107.188,102.362 107.696,102.362 108.204,102.362 110.871,102.362 111.379,102.362 111.887,102.362 114.3,102.362 114.808,102.362 115.316,102.362 95.758,102.743 96.266,102.743 96.774,102.743 97.282,102.743 102.743,103.124 107.188,103.124 111.633,103.124 95.758,103.251 96.266,103.251 96.774,103.251 97.282,103.251 102.743,103.632 107.188,103.632 111.633,103.632 95.758,103.759 96.266,103.759 96.774,103.759 97.282,103.759 102.743,104.14 107.188,104.14 111.633,104.14 95.758,104.267 96.266,104.267 96.774,104.267 97.282,104.267 102.743,104.648 107.188,104.648 111.633,104.648 102.743,105.156 107.188,105.156 111.633,105.156 113.792,105.283 114.3,105.283 114.808,105.283 115.316,105.283 115.824,105.283 113.792,105.791 114.3,105.791 114.808,105.791 115.316,105.791 115.824,105.791 113.792,106.299 114.3,106.299 114.808,106.299 115.316,106.299 115.824,106.299 113.792,106.807 114.3,106.807 114.808,106.807 115.316,106.807 115.824,106.807 113.792,107.315 114.3,107.315 114.808,107.315 115.316,107.315 115.824,107.315 113.792,107.823 114.3,107.823 114.808,107.823 115.316,107.823
CELL1: D9.3 pad.0@135.934,77.343 Q8.6 Q10.1 Q11.2 R17.2 R22.1 | length 58.8
  Top Layer w0.254: Q11.2@109.583,50.815 110.251,50.815 v1(110.363,50.927) 110.7,50.59 R22.1@111.125,50.59 ; v1(113.665,50.927) 113.665,52.832 119.761,58.928 D9.3@121.938,58.928 ; 132.443,80.409 Q10.1@132.443,82.281 133.081,82.281 133.306,82.506 R17.2@133.731,82.506
  Bottom Layer w0.254: v1(110.363,50.927) 114.173,50.927 119.38,56.134 128.651,56.134 133.604,61.087 v1(133.604,74.803)
CELL2: D7.3 pad.0@92.434,52.228 Q7.6 Q11.1 Q14.2 R22.2 R27.1 | length 51.2
  Top Layer w0.254: v1(88.055,67.481) R27.1@88.055,68.072 88.055,68.751 88.28,68.976 Q14.2@88.28,69.741 ; 102.235,47.752 109.22,47.752 109.583,48.115 Q11.1@109.583,49.515 110.348,49.515 110.573,49.74 R22.2@111.125,49.74 ; v1(114.046,58.547) 117.221,58.547 118.745,60.071 120.777,60.071 121.031,60.325 121.031,61.214 121.285,61.468 D7.3@121.938,61.468
  Signal Layer 1 w0.254: v1(88.055,67.481) 88.055,56.598 v1(89.789,54.864)
  Bottom Layer w0.254: v1(108.458,47.752) 108.458,51.435 109.728,52.705 109.728,58.039 110.236,58.547 v1(114.046,58.547)
CELL3: D1.1 Q13.5 R28.1 R29.1 R30.2 R36.1 | length 28.1
  Top Layer w0.254: R36.1@82.975,68.072 v1(83.693,68.072) ; v1(89.535,69.596) 90.297,69.596 R29.1@91.186,68.707 ; 93.853,75.311 96.901,75.311 98.171,74.041 98.171,62.865 98.425,62.611 R30.2@99.905,62.611 ; D1.1@97.028,69.547 98.093,69.547
  Bottom Layer w0.254: v1(83.693,68.072) 86.614,68.072 88.138,69.596 v1(89.535,69.596)
CHG: D10.1 Q17.1 R15.1 U1.11 | length 23
  Top Layer w0.254: U1.11@109.63,67.553 108.342,67.553 108.077,67.818 108.077,69.85 108.331,70.104 112.014,70.104 112.185,70.275 R15.1@112.185,70.993 112.185,71.545 112.649,72.009 116.692,72.009 118.866,69.835 Q17.1@123.299,69.835 123.937,69.835 124.169,70.067 D10.1@124.714,70.067
CHGG: D10.2 Q2.9 Q3.9 Q5.9 Q16.9 Q17.2 Q19.9 R41.1 | length 63.8
  Top Layer w0.254: v1(83.947,85.725) 84.01,85.788 Q16.9@84.799,85.788 ; v1@90.297,85.852 v1(90.361,85.788) Q3.9@91.149,85.788 ; v1@96.647,85.725 v1(96.71,85.788) Q2.9@97.499,85.788 ; v1@111.125,85.725 v1(111.155,85.755) Q19.9@111.993,85.755 ; v1@117.475,85.725 v1(117.505,85.755) Q5.9@118.343,85.755 ; Q17.2@123.299,71.135 123.299,72.118 123.608,72.427 D10.2@124.714,72.427 124.714,73.152 124.758,73.196 R41.1@124.758,73.914 124.758,75.013 v1(124.333,75.438)
  Signal Layer 1 w0.254: v1(117.505,85.755) 117.505,76.678 118.745,75.438 v1(124.333,75.438)
  Bottom Layer w0.254: v1(83.947,85.725) 83.947,86.106 84.455,86.614 90.424,86.614 ; v1(90.361,85.788) 90.361,86.551 90.424,86.614 ; v1(96.71,85.788) 96.71,86.55 96.774,86.614 ; v1(111.155,85.755) 111.155,86.584 111.125,86.614 ; v1(117.505,85.755) 117.505,86.076 116.967,86.614 111.125,86.614 ; 90.424,86.614 96.774,86.614 ; 96.774,86.614 111.125,86.614
COIN: R33.1 U1.3 | length 6.3
  Top Layer w0.254: R33.1@105.835,59.436 105.835,61.639 106.549,62.353 U1.3@109.63,62.353
DISG: D11.2 Q1.9 Q4.9 Q6.9 Q18.9 Q20.9 Q21.2 R6.2 R31.1 | length 78
  Top Layer w0.254: Q4.9@88.561,91.773 89.233,91.773 v1(89.281,91.821) ; Q1.9@94.911,91.773 v1(95.71,91.773) v1@95.758,91.821 ; Q20.9@101.261,91.773 v1(102.029,91.773) v1@102.108,91.694 ; Q6.9@115.702,91.697 116.456,91.697 v1(116.459,91.694) ; Q21.2@117.366,74.407 118.491,74.407 ; R31.1@118.745,73.196 R31.1@118.701,73.152 118.701,73.958 118.491,74.168 118.491,74.549 118.491,77.089 118.618,77.216 D11.2@119.671,77.216 121.285,77.216 ; R6.2@121.285,75.482 121.285,77.216 ; Q18.9@122.068,91.664 122.779,91.664 v1(122.809,91.694) ; v1(122.301,77.47) 122.047,77.216 121.285,77.216
  Signal Layer 1 w0.254: v1(89.281,91.821) 95.661,91.821 v1(95.71,91.773) v1(102.029,91.773) 104.981,91.773 105.918,92.71 105.918,98.044 106.172,98.298 107.823,98.298 108.331,97.79 108.331,92.583 109.22,91.694 v1(116.459,91.694) 118.364,91.694 ; v1(122.301,77.47) 122.301,79.502 121.666,80.137 118.618,80.137 117.983,80.772 117.983,85.111 118.364,85.492 118.364,91.694 ; v1(122.809,91.694) 118.364,91.694
DO: R10.1 U1.12 | length 4
  Top Layer w0.254: U1.12@109.63,68.203 R10.1@113.617,68.203
DOIN: R32.1 U1.2 | length 4.3
  Top Layer w0.254: R32.1@107.398,59.436 107.398,61.297 107.804,61.703 U1.2@109.63,61.703
ISEN_N: Q1.1 Q1.2 Q1.3 Q1.4 Q4.1 Q4.2 Q4.3 Q4.4 Q6.1 Q6.2 Q6.3 Q6.4 Q18.1 Q18.2 Q18.3 Q18.4 Q20.1 Q20.2 Q20.3 Q20.4 Q21.3 R1.1 R2.1 R3.1 R4.1 R6.1 R8.2 | length 46
  Top Layer w0.254: R8.2@114.471,69.596 v1(115.57,69.596) ; Q21.3@119.616,75.057 120.142,75.057 v1(120.567,74.632) R6.1@121.285,74.632
  Signal Layer 1 w0.254: v1(107.061,97.536) 107.061,89.916 107.569,89.408 108.712,89.408 110.871,87.249 115.788,87.249 116.124,86.914 116.124,70.15 v1(115.57,69.596)
  Bottom Layer w0.254: v1(116.078,76.581) 117.094,77.597 120.142,77.597 120.567,77.172 v1(120.567,74.632)
  other v1: 111.887,92.583 112.395,92.583 112.903,92.583 113.411,92.583 113.919,92.583 114.427,92.583 114.935,92.583 115.443,92.583 118.237,92.583 118.745,92.583 119.253,92.583 119.761,92.583 120.269,92.583 120.777,92.583 121.285,92.583 121.793,92.583 122.301,92.583 84.709,92.71 85.217,92.71 85.725,92.71 86.233,92.71 86.741,92.71 87.249,92.71 87.757,92.71 88.265,92.71 88.773,92.71 90.932,92.71 91.44,92.71 91.948,92.71 92.456,92.71 92.964,92.71 93.472,92.71 93.98,92.71 94.488,92.71 97.409,92.71 97.917,92.71 98.425,92.71 98.933,92.71 99.441,92.71 99.949,92.71 100.457,92.71 100.965,92.71 111.887,93.091 112.395,93.091 112.903,93.091 113.411,93.091 113.919,93.091 114.427,93.091 114.935,93.091 115.443,93.091 118.237,93.091 118.745,93.091 119.253,93.091 119.761,93.091 120.269,93.091 120.777,93.091 121.285,93.091 121.793,93.091 122.301,93.091 84.709,93.218 85.217,93.218 85.725,93.218 86.233,93.218 86.741,93.218 87.249,93.218 87.757,93.218 88.265,93.218 88.773,93.218 90.932,93.218 91.44,93.218 91.948,93.218 92.456,93.218 92.964,93.218 93.472,93.218 93.98,93.218 94.488,93.218 97.409,93.218 97.917,93.218 98.425,93.218 98.933,93.218 99.441,93.218 99.949,93.218 100.457,93.218 100.965,93.218 111.887,93.599 112.395,93.599 112.903,93.599 113.411,93.599 113.919,93.599 114.427,93.599 114.935,93.599 115.443,93.599 118.237,93.599 118.745,93.599 119.253,93.599 119.761,93.599 120.269,93.599 120.777,93.599 121.285,93.599 121.793,93.599 122.301,93.599 84.709,93.726 85.217,93.726 85.725,93.726 86.233,93.726 86.741,93.726 87.249,93.726 87.757,93.726 88.265,93.726 88.773,93.726 90.932,93.726 91.44,93.726 91.948,93.726 92.456,93.726 92.964,93.726 93.472,93.726 93.98,93.726 94.488,93.726 97.409,93.726 97.917,93.726 98.425,93.726 98.933,93.726 99.441,93.726 99.949,93.726 100.457,93.726 100.965,93.726 111.887,94.107 112.395,94.107 112.903,94.107 113.411,94.107 113.919,94.107 114.427,94.107 114.935,94.107 115.443,94.107 118.237,94.107 118.745,94.107 119.253,94.107 119.761,94.107 120.269,94.107 120.777,94.107 121.285,94.107 121.793,94.107 122.301,94.107 84.709,94.234 85.217,94.234 85.725,94.234 86.233,94.234 86.741,94.234 87.249,94.234 87.757,94.234 88.265,94.234 88.773,94.234 90.932,94.234 91.44,94.234 91.948,94.234 92.456,94.234 92.964,94.234 93.472,94.234 93.98,94.234 94.488,94.234 97.409,94.234 97.917,94.234 98.425,94.234 98.933,94.234 99.441,94.234 99.949,94.234 100.457,94.234 100.965,94.234 111.887,94.615 112.395,94.615 112.903,94.615 113.411,94.615 113.919,94.615 114.427,94.615 114.935,94.615 115.443,94.615 118.237,94.615 118.745,94.615 119.253,94.615 119.761,94.615 120.269,94.615 120.777,94.615 121.285,94.615 121.793,94.615 122.301,94.615 84.709,94.742 85.217,94.742 85.725,94.742 86.233,94.742 86.741,94.742 87.249,94.742 87.757,94.742 88.265,94.742 88.773,94.742 90.932,94.742 91.44,94.742 91.948,94.742 92.456,94.742 92.964,94.742 93.472,94.742 93.98,94.742 94.488,94.742 97.409,94.742 97.917,94.742 98.425,94.742 98.933,94.742 99.441,94.742 99.949,94.742 100.457,94.742 100.965,94.742 111.887,95.123 112.903,95.123 114.427,95.123 114.935,95.123 115.443,95.123 118.237,95.123 118.745,95.123 119.253,95.123 119.761,95.123 120.269,95.123 120.777,95.123 121.285,95.123 121.793,95.123 122.301,95.123 84.709,95.25 85.217,95.25 85.725,95.25 86.233,95.25 86.741,95.25 87.249,95.25 87.757,95.25 88.265,95.25 88.773,95.25 90.932,95.25 91.44,95.25 91.948,95.25 92.456,95.25 92.964,95.25 93.472,95.25 93.98,95.25 94.488,95.25 97.409,95.25 97.917,95.25 98.425,95.25 98.933,95.25 99.441,95.25 99.949,95.25 100.457,95.25 100.965,95.25 114.427,95.631 114.935,95.631 115.443,95.631 118.745,95.631 119.761,95.631 121.285,95.631 122.301,95.631 118.213,95.664 119.233,95.664 120.253,95.664 120.753,95.664 121.773,95.664 96.139,96.774 96.647,96.774 97.155,96.774 97.663,96.774 98.171,96.774 98.679,96.774 99.187,96.774 99.695,96.774 100.203,96.774 100.711,96.774 101.219,96.774 101.727,96.774 102.235,96.774 111.633,96.774 112.141,96.774 112.649,96.774 113.157,96.774 113.665,96.774 114.173,96.774 114.681,96.774 115.189,96.774 115.697,96.774 116.205,96.774 116.713,96.774 117.221,96.774 96.139,97.282 96.139,97.282 96.647,97.282 97.155,97.282 97.663,97.282 98.171,97.282 98.679,97.282 99.187,97.282 99.695,97.282 100.203,97.282 100.711,97.282 101.219,97.282 101.727,97.282 102.235,97.282 111.633,97.282 112.141,97.282 112.649,97.282 113.157,97.282 113.665,97.282 114.173,97.282 114.681,97.282 115.189,97.282 115.697,97.282 116.205,97.282 116.713,97.282 117.221,97.282 96.139,97.79 96.647,97.79 97.155,97.79 97.663,97.79 98.171,97.79 98.679,97.79 99.187,97.79 99.695,97.79 100.203,97.79 100.711,97.79 101.219,97.79 101.727,97.79 102.235,97.79 111.633,97.79 112.141,97.79 112.649,97.79 113.157,97.79 113.665,97.79 114.173,97.79 114.681,97.79 115.189,97.79 115.697,97.79 116.205,97.79 116.713,97.79 117.221,97.79 96.139,98.298 96.647,98.298 97.155,98.298 97.663,98.298 98.171,98.298 98.679,98.298 99.187,98.298 99.695,98.298 100.203,98.298 100.711,98.298 101.219,98.298 101.727,98.298 102.235,98.298 111.633,98.298 112.141,98.298 112.649,98.298 113.157,98.298 113.665,98.298 114.173,98.298 114.681,98.298 115.189,98.298 115.697,98.298 116.205,98.298 116.713,98.298 117.221,98.298
NetC12_1: C12.1 R7.1 U2.1 | length 13.3
  Top Layer w0.254: U2.1@112.08,73.174 v1(112.08,73.853) v1@112.141,73.914 ; v1(114.808,77.216) 114.891,77.299 C12.1@115.443,77.299 ; R7.1@116.249,73.152 116.967,73.152 117.094,73.025 v1(117.094,72.517)
  Bottom Layer w0.254: v1(112.08,73.853) 112.08,74.742 112.522,75.184 114.49,75.184 ; v1(114.808,77.216) 114.49,76.898 114.49,75.184 ; v1(117.094,72.517) 117.094,74.422 116.332,75.184 114.49,75.184
NetC14_1: C14.1 D13.A R7.2 U2.3 U2.6 | length 56.5
  Top Layer w0.254: C14.1@81.07,87.503 v1(81.788,87.503) ; v1(82.55,91.567) 82.55,92.583 82.931,92.964 82.931,95.758 83.185,96.012 83.185,96.449 D13.A@82.611,97.024 ; v1(112.014,76.962) 112.08,76.896 U2.6@112.08,75.924 112.08,75.118 112.522,74.676 113.538,74.676 113.98,74.234 U2.3@113.98,73.174 114.002,73.152 R7.2@115.399,73.152
  Signal Layer 1 w0.254: v1(81.788,87.503) 108.458,87.503 109.474,86.487 109.474,81.534 112.014,78.994 v1(112.014,76.962)
  Bottom Layer w0.254: v1(81.788,87.503) 82.042,87.503 82.55,88.011 v1(82.55,91.567)
NetC14_2: C14.2 LS1.2 | length 2.8
  Top Layer w0.254: LS1.2@79.556,89.9 80.391,89.064 80.391,88.265 80.22,88.094 C14.2@80.22,87.503
NetD1_2: D1.2 R12.2 | length 3.2
  Top Layer w0.254: R12.2@97.028,63.374 D1.2@97.028,66.597
NetD2_A: D2.A R34.2 | length 7
  Top Layer w0.254: R34.2@82.125,63.5 82.125,61.766 83.276,60.615 D2.A@83.276,56.932
NetD3_A: D3.A R35.2 | length 5.8
  Top Layer w0.254: D3.A@79.441,62.099 79.752,62.099 80.391,62.738 80.391,65.405 80.772,65.786 R35.2@82.125,65.786
NetD4_A: D4.A R36.2 | length 5.7
  Top Layer w0.254: D4.A@76.891,68.008 77.152,68.008 77.724,68.58 79.502,68.58 80.01,68.072 R36.2@82.125,68.072
NetD5_A: D5.A R37.2 | length 11.6
  Top Layer w0.254: R37.2@127.044,61.595 129.286,61.595 131.318,63.627 131.318,65.151 131.826,65.659 133.731,65.659 134.582,64.808 D5.A@135.754,64.808
NetD6_A: D6.A D9.2 | length 9
  Top Layer w0.254: D9.2@124.188,59.578 124.218,59.548 130.922,59.548 131.12,59.746 133.092,59.746 D6.A@133.092,59.785
NetD6_K: D6.K R38.1 | length 7.8
  Top Layer w0.254: R38.1@127.044,60.198 129.54,60.198 131.191,61.849 133.132,61.849 D6.K@133.862,61.119
NetD7_1: D7.1 R38.2 | length 2.3
  Top Layer w0.254: D7.1@124.188,60.818 124.856,60.818 125.476,60.198 R38.2@126.194,60.198
NetD7_2: D7.2 R37.1 | length 2.2
  Top Layer w0.254: D7.2@124.188,62.118 125.08,62.118 125.603,61.595 R37.1@126.194,61.595
NetD8_K: D8.K R39.1 | length 5
  Top Layer w0.254: R39.1@127.044,58.801 129.286,58.801 129.667,58.42 129.667,57.35 D8.K@130.465,56.551
NetD9_1: D9.1 R39.2 | length 2.2
  Top Layer w0.254: D9.1@124.188,58.278 124.826,58.278 125.349,58.801 R39.2@126.194,58.801
NetD11_1: D11.1 Q21.1 R5.1 R10.2 R31.2 | length 20.2
  Top Layer w0.254: R10.2@114.471,68.199 115.824,68.199 116.513,68.888 116.513,70.793 v1(116.713,70.993) ; v1(115.443,76.327) R5.1@115.443,75.482 115.487,75.438 116.332,75.438 116.601,75.707 Q21.1@117.366,75.707 117.366,76.182 117.311,76.237 D11.1@117.311,77.216 ; v1(119.551,72.688) R31.2@119.551,73.152
  Bottom Layer w0.254: v1(115.443,76.327) 115.824,75.946 117.221,75.946 118.491,74.676 118.491,73.406 ; v1(116.713,70.993) 117.348,70.993 118.491,72.136 118.491,73.787 119.126,73.787 119.551,73.362 v1(119.551,72.688)
NetD13_K: D13.K R11.2 | length 10.3
  Top Layer w0.254: R11.2@77.934,87.503 77.934,88.475 v1(78.232,88.773) ; D13.K@81.727,95.762 82.296,95.194 v1(82.296,95.123)
  Bottom Layer w0.254: v1(78.232,88.773) 82.296,92.837 v1(82.296,95.123)